# Altium PCB BB_SOT23_MOSFET.PcbDoc
Units mil, origin at the board's own origin, x right, y up, seen from the top; angles counter-clockwise.
Board outline 551.18 x 551.18 mil, 2 copper layers (Top Layer, Bottom Layer); 9 components, 5 nets, 20 pads, 0 vias.
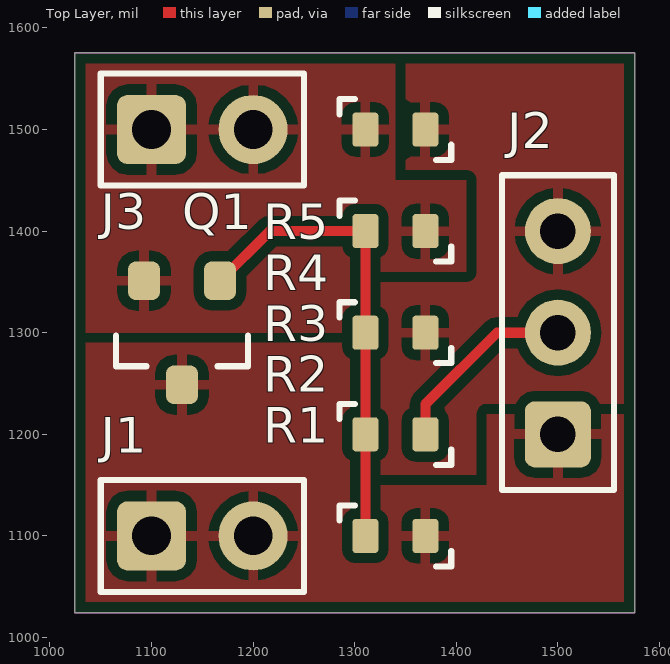
[diagram p0: Top Layer view]
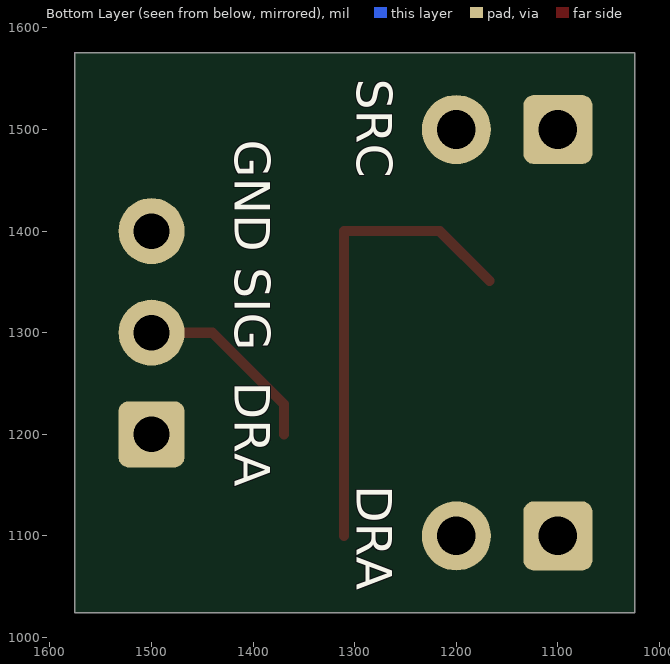
[diagram p1: Bottom Layer view, seen from below]
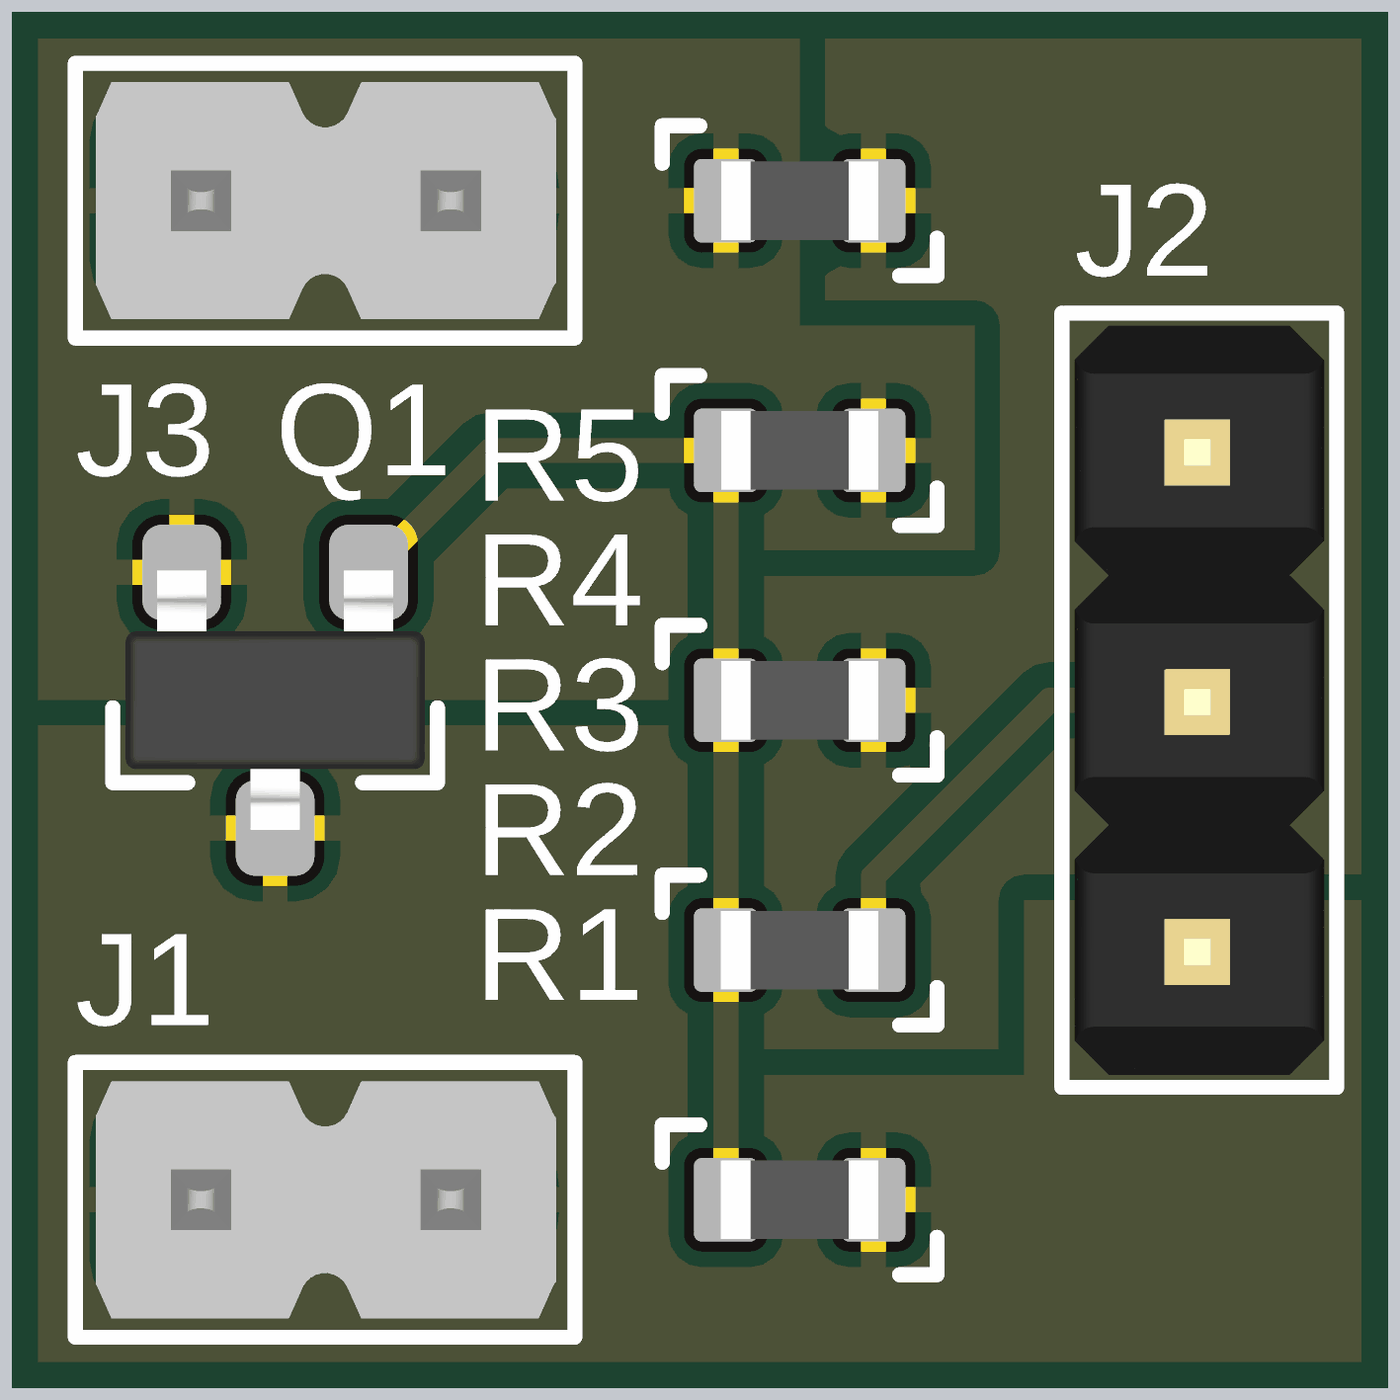
[diagram p2: 3D render of the assembled board from above, using the file's embedded part models]

## Layer stack, top to bottom
Top Solder: solder mask 0.4, Solder Resist, Dk 3.5
Top Layer: signal copper 1.4
Dielectric 1: dielectric 12.6, FR-4, Dk 4.8
Bottom Layer: signal copper 1.4
Bottom Solder: solder mask 0.4, Solder Resist, Dk 3.5

## Board outline
1024.41,1024.41 1024.41,1575.59 1575.59,1575.59 1575.59,1024.41

## Design rules (kind name [scope] priority, off if disabled: settings)
Clearance [All] p1: gap=10 ignorepadtopadclearanceinfootprint=FALSE except(0: Arc-Hole Track-Hole SMDPad-Hole THPad-Hole Via-Hole Fill-Hole Poly-Hole Region-Hole Text-Hole)
PolygonConnect [All] p1: connectstyle=Relief reliefconductorwidth=10 reliefentries=4 polygonreliefangle="90 Angle" airgapwidth=10
RoutingVias [All] p1: holewidth=28 width=50 viastyle="Through Hole" minholewidth=28 minwidth=50 maxholewidth=28 maxwidth=50
SolderMaskExpansion [All] p1: expansion=4
Width [All] p1: maxlimit=10 minlimit=10 preferedwidth=10
30 further rules are at their usual default settings.

## Components (designator, comment, footprint, x,y, rotation, side; value= is the part's Value field where it differs from the comment)
J1 "D" HEADER-2.54-2P1 1150,1100 r0 top locked
J2 "G" HEADER-2.54-3P1 1500,1300 r90 top locked
J3 "S" HEADER-2.54-2P1 1150,1500 r0 top locked
Q1 "N-MOS" IRLML_SOT-23 1130,1300 r270 top
R1 "10K" 0603R_RF_M 1340,1100 r180 top
R2 "100R" 0603R_RF_M 1340,1200 r180 top
R3 "10K" 0603R_RF_M 1340,1300 r0 top
R4 "10K" 0603R_RF_M 1340,1400 r0 top
R5 "0R" 0603R_RF_M 1340,1500 r0 top

## Footprints (in the part's own frame and the unit in brackets; to place one, negate y for a bottom-side part, rotate by r counter-clockwise, add the part's x,y. Pads: shape width x height; smd on the part's side, far side on the other; paste and mask are expansions set on the pad)
0603R_RF_M [mm] "Chip Resistor 0603 Reflow Medium"
  rrect25% 0.65x0.85 smd: 1(-0.75,0) 2(0.75,0)
  silkscreen extent -1.4,-0.76 1.4,0.76, body extent -0.8,-0.4 0.8,0.4, height 0.55
HEADER-2.54-2P1 [mil] "Pin Header Single Row 2 Positions Pitch 2.54 mm"
  rrect30% 68x68 hole 38: 1(-50,0)
  round 68 hole 38: 2(50,0)
  silkscreen extent -100,-55 100,55, body extent -92,-47 92,47, height 330
HEADER-2.54-3P1 [mil] "Pin Header Single Row 3 Positions Pitch 2.54 mm"
  rrect30% 65x65 hole 35: 1(-100,0)
  round 65 hole 35: 2(0,0) 3(100,0)
  silkscreen extent -155,-55 155,55, body extent -150,-50 150,50, height 362
IRLML_SOT-23 [mm] "Infineon's IRLML Series Logic-Level Transistor SOT-23"
  rrect50% 0.97x0.8 smd: 1(-1.3,0.95) 2(-1.3,-0.95) 3(1.3,0)
  silkscreen extent 0.08,-1.65 0.84,1.65, body extent -1.32,-1.52 1.32,1.52, height 1.12

## Part data
J1 J3: library part PINHDR-2P1, "Pin Header Single Row 2 Positions", Mounting Technology=THT
J2: library part PINHDR-3P1, "Generic Pin Header 3x1"
Q1: "MOSFET N-Channel", Manufacturer="Generic Brand", Power Rating="? W", Category=Transistor, IGS="? A", Mounting Technology=SMT, Supplier Link=http://, VDS="? V", VGS="? V"
R1 R2 R3 R4 R5: library part R, "Resistor", Manufacturer="Generic Brand", Max Voltage="? V", Power Rating="? W", Tolerance=?, Category=Resistor, Mounting Technology=SMT, Supplier Link=http://

## Nets (pads, with @x,y where several pads share a name; then routed paths per layer and width w, separated by ;. In a path a pad name is that pad's centre, name@x,y a point inside that pad or via, vN(x,y) a via of type N, cw(c..) or ccw(c..) an arc to the next point about the centre after c; other vN are vias at no path point)
DRAIN: J1.1 J1.2 J2.1 Q1.3 R1.1
GATE: Q1.1 R1.2 R2.2 R3.1 R4.1 | length 463.3
  Top Layer w10: Q1.1 1216.22,1400 R4.1 R3.1 R1.2
SIG: J2.2 R2.1 | length 189.2
  Top Layer w10: R2.1 1369.53,1229.53 1440,1300 J2.2
SIG_GND: J2.3 R3.2 R5.2
SOURCE: J3.1 J3.2 Q1.2 R4.2 R5.1

## Polygon pours and split planes (outlines as drawn)
SIG_GND on Top Layer "SIG_GND_L01_P004" (solid, remove dead copper, pour order 4): 1600,1600 1300,1600 1310,1590 1310,1000 1600,1000
SOURCE on Top Layer "SOURCE_L01_P002" (solid, remove dead copper, pour order 2): 1410,1360 1310.47,1360 1310.47,1300 1000,1300 1000,1600 1340,1600 1340,1450 1410,1450
DRAIN on Top Layer "DRAIN_L01_P000" (solid, remove dead copper, pour order 0): 1310.47,1290 1310.47,1150 1429.8,1150 1429.8,1220 1600,1220 1600,1000 1000,1000 1000,1290

## Keep-outs
Keep-Out Layer:
  the board outline again, w1

## Silkscreen, mask and mechanical layers (free items; w line width, h text height)
Bottom Overlay:
  text "SRC" at 1310,1550 h60 r90
  text "GND SIG  DRA" at 1430,1490 h60 r90
  text "DRA" at 1310,1150 h60 r90
Mechanical 1:
  the board outline again, w3